# EAGLE board power_stage (EAGLE 7.2.0)
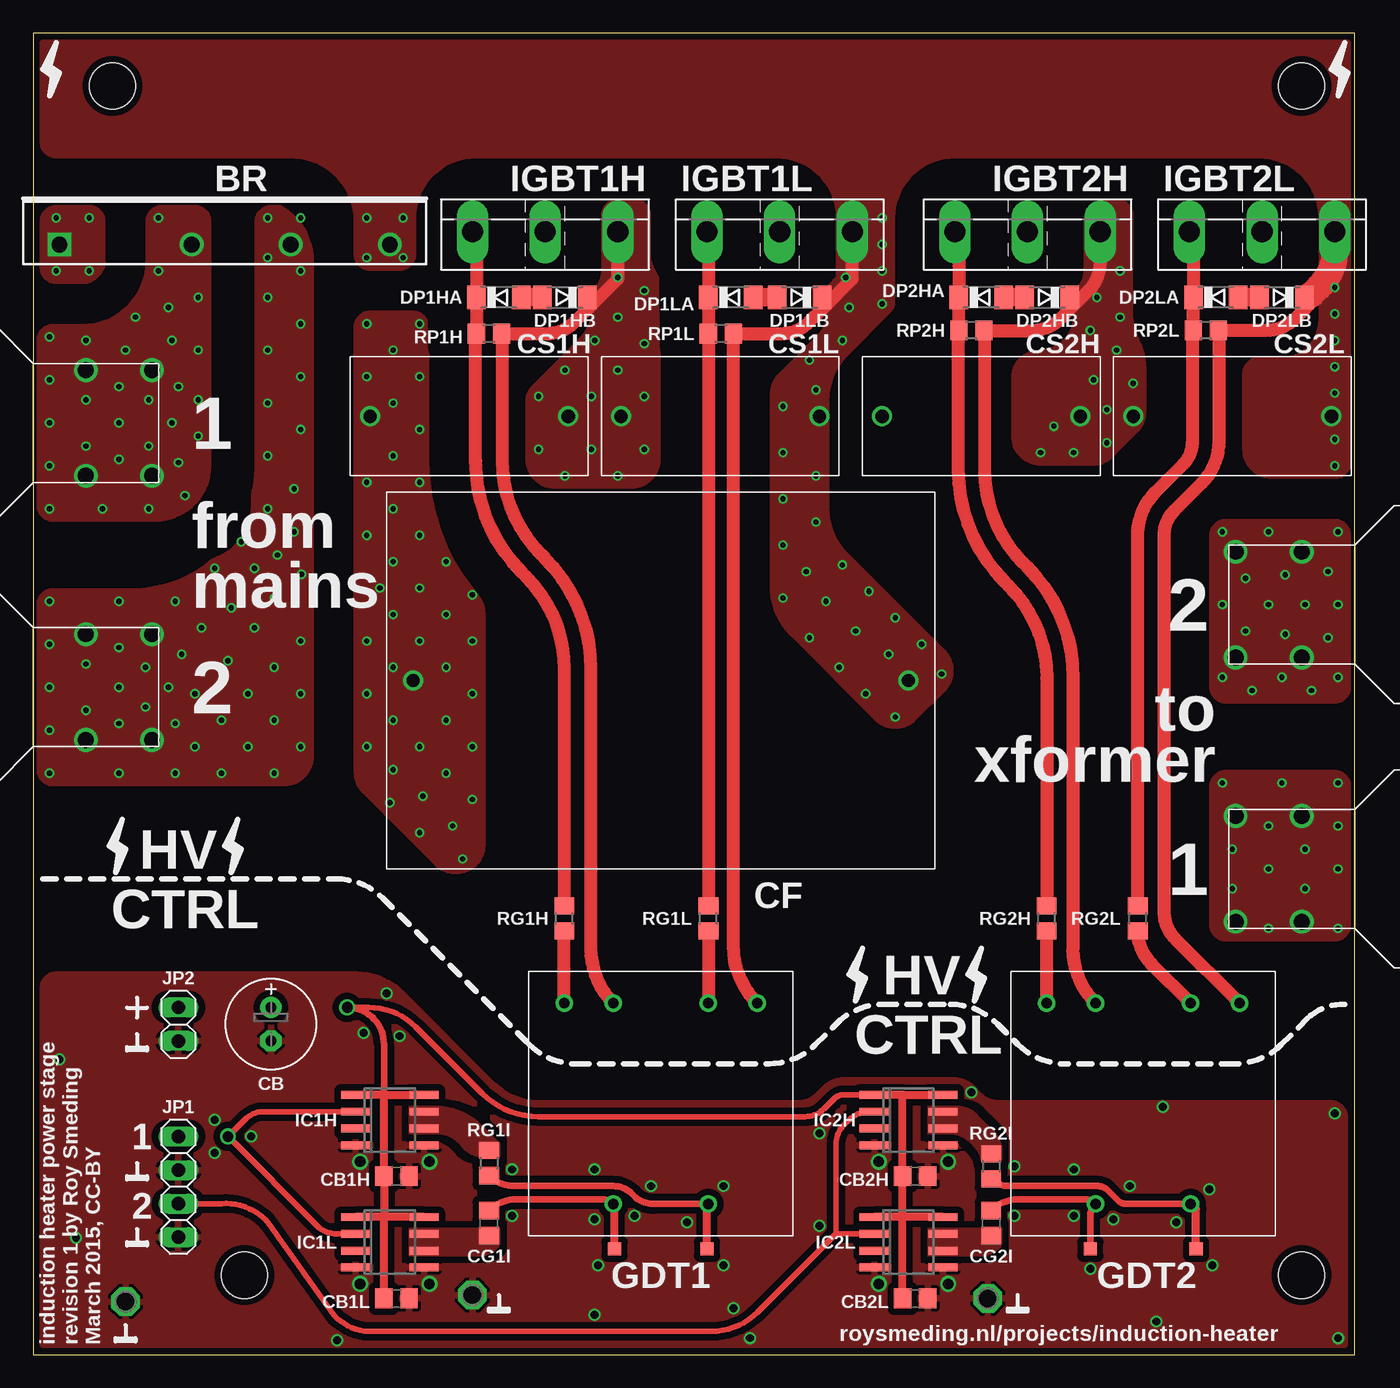
[diagram p0: board, top side]
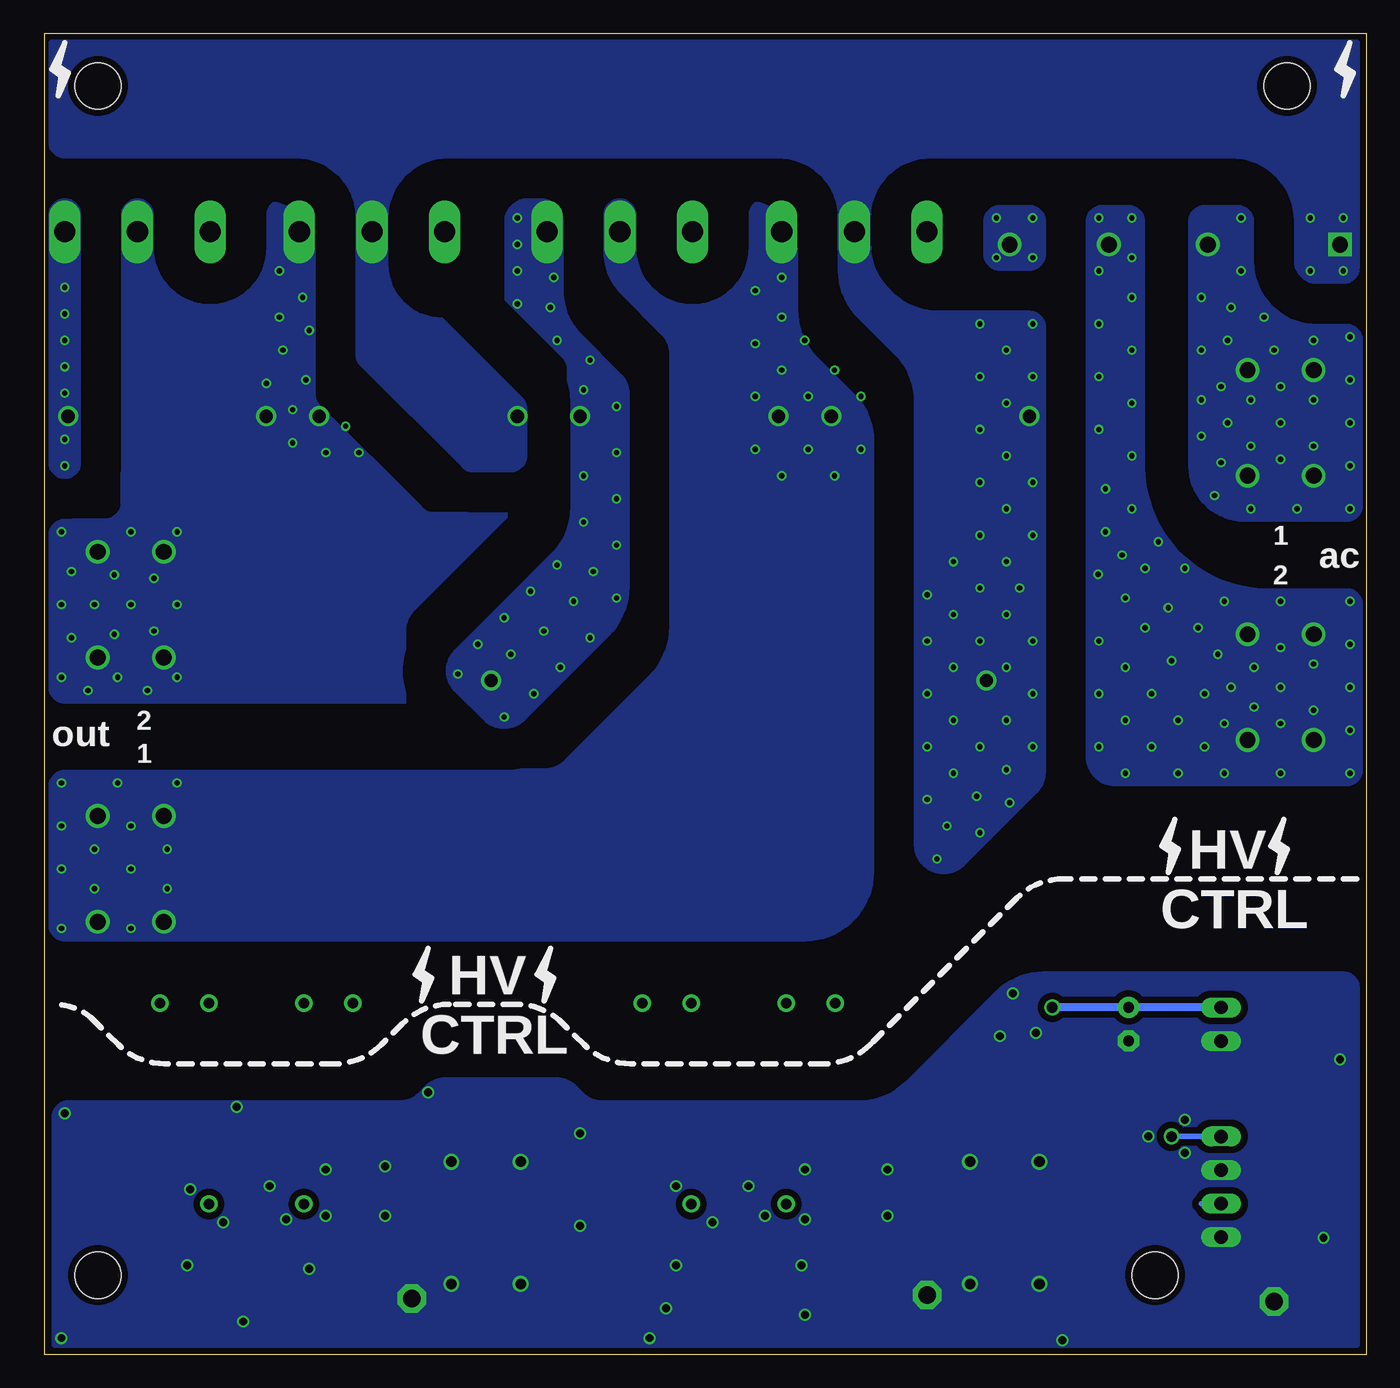
[diagram p1: board, bottom side, seen from below]

Size 100 x 100 mm. Coordinates in mm from the lower left corner, seen from the top.
Outline: 0,0 100,0 100,100 0,100 0,0
Copper layers (1*16): Top 0.035mm / dielectric 1.5mm / Bottom 0.035mm
Design rules "dirt_cheap_dirty_boards.v1 *": minimum track width 5mil, minimum drill 12mil, track to track 5mil, track to pad 5mil, pad to pad 5mil, via to via 5mil, smd to smd 0mil, copper to edge 0mil, drill to drill 10mil, minimum pad ring 10mil, minimum via ring 6mil, stop-mask expansion 2mil, vias tented up to drill 25mil, thermal gap 10mil
Holes 3.5 mm at 96,6 16,6 6,96 96,96

## Footprints (pad centres in the part's own frame; a part is rotated, then mirrored left to right if it is on the bottom)
SCREW = drill 1.2: P$1 -2.5,-4; P$2 -2.5,4; P$3 2.5,4; P$4 2.5,-4
D25XB60 = drill 1.2 square: + -13.75,0 | drill 1.2: - 11.25,0; AC1 -3.75,0; AC2 3.75,0
E2,5-7 = drill 0.813 pad 1.6: + -1.27,0 | drill 0.813 pad 1.6 octagon: - 1.27,0
C0805 = smd 1.3 x 1.5: 1 -0.95,0; 2 0.95,0
R75 = drill 1: P$1 -18.75,0; P$2 18.75,0
R76 = drill 1: P$1 -7.5,0; P$2 7.5,0
SOD80C = smd 1.4 x 1.8: A 1.7,0; C -1.7,0
GDT = drill 0.8: PA -7.6,3.6; PB -7.6,-3.6; S1A 7.6,7.3; S1B 7.6,3.6; S2A 7.6,-7.3; S2B 7.6,-3.6
SO-08 = smd 0.6 x 2.2: 1 -1.905,-2.6; 2 -0.635,-2.6; 3 0.635,-2.6; 4 1.905,-2.6; 5 1.905,2.6; 6 0.635,2.6; 7 -0.635,2.6; 8 -1.905,2.6
TO-247AD-V = drill 1.6 long: D 0,-2.54; G -5.5,-2.54; S 5.5,-2.54
1X04 = drill 1.016 long: 1 -3.81,0; 2 -1.27,0; 3 1.27,0; 4 3.81,0
1X02 = drill 1.016 long: 1 -1.27,0; 2 1.27,0
R0805 = smd 1.3 x 1.5: 1 -0.95,0; 2 0.95,0
TP10SQ = smd 1 x 1: TP 0,0
P1-13 = drill 1.321 pad 2.159 octagon: TP 0,0

## Placement (x,y rotation side)
AC1  AC1  [SCREW]  6.5,70.5 0 top
AC2  AC2  [SCREW]  6.5,50.5 0 top
BR  D25XB60  [D25XB60]  15.75,84 0 top
CB  100µF  [E2,5-7]  18,25 270 top
CB1H  1µF  [C0805]  27.5,13.5 0 top
CB1L  1µF  [C0805]  27.5,4.25 0 top
CB2H  1µF  [C0805]  66.75,13.5 0 top
CB2L  1µF  [C0805]  66.75,4.25 0 top
CF  3.3µF  [R75]  47.5,51 180 top
CG1I  1µF  [C0805]  34.5,9.95 270 top
CG2I  1µF  [C0805]  72.5,9.95 270 top
CS1H  [R76]  33,71 180 top
CS1L  [R76]  52,71 180 top
CS2H  [R76]  71.75,71 180 top
CS2L  [R76]  90.75,71 180 top
DP1HA  [SOD80C]  35.25,80 0 top
DP1HB  [SOD80C]  40.25,80 180 top
DP1LA  [SOD80C]  52.8,80 0 top
DP1LB  [SOD80C]  58,80 180 top
DP2HA  [SOD80C]  71.75,80 0 top
DP2HB  [SOD80C]  76.75,80 180 top
DP2LA  [SOD80C]  89.5,80 0 top
DP2LB  [SOD80C]  94.5,80 180 top
GDT1  GDT  [GDT]  47.5,19 90 top
GDT2  GDT  [GDT]  84,19 90 top
IC1H  MIC4420M  [SO-08]  27,17.75 270 top
IC1L  MIC4429M  [SO-08]  27,8.5 270 top
IC2H  MIC4420M  [SO-08]  66.25,17.75 270 top
IC2L  MIC4429M  [SO-08]  66.25,8.5 270 top
IGBT1H  IXGR32N60CD1  [TO-247AD-V]  38.75,87.5 0 top
IGBT1L  IXGR32N60CD1  [TO-247AD-V]  56.5,87.5 0 top
IGBT2H  IXGR32N60CD1  [TO-247AD-V]  75.25,87.5 0 top
IGBT2L  IXGR32N60CD1  [TO-247AD-V]  93,87.5 0 top
JP1  control  [1X04]  11,12.69 270 top
JP2  power  [1X02]  11,25 90 top
OUT1  OUT1  [SCREW]  93.5,36.75 180 top
OUT2  OUT2  [SCREW]  93.5,56.75 180 top
RG1H  [R0805]  40.2,33 90 top
RG1I  [R0805]  34.5,14.5 270 top
RG1L  [R0805]  51.1,33 90 top
RG2H  [R0805]  76.7,33 90 top
RG2I  [R0805]  72.5,14.25 270 top
RG2L  [R0805]  83.6,33 90 top
RP1H  [R0805]  34.5,77.25 180 top
RP1L  [R0805]  52.05,77.25 180 top
RP2H  [R0805]  71,77.5 180 top
RP2L  [R0805]  88.75,77.5 180 top
TP_GDI1A  A  [TP10SQ]  44,8 0 top
TP_GDI1B  B  [TP10SQ]  51,8 0 top
TP_GDI2A  B  [TP10SQ]  88,8 0 top
TP_GDI2B  A  [TP10SQ]  80,8 0 top
TP_GNDA  GND  [P1-13]  7,4 0 top
TP_GNDB  GND  [P1-13]  33.25,4.5 0 top
TP_GNDC  GND  [P1-13]  72.25,4.25 0 top

## Library data of the parts
AC1 AC2 BR CF CS1H CS1L CS2H CS2L GDT1 GDT2 IC1H IC1L IC2H IC2L IGBT1H IGBT1L IGBT2H IGBT2L OUT1 OUT2 = induction-heater
CB CB1H CB1L CB2H CB2L CG1I CG2I RG1H RG1I RG1L RG2H RG2I RG2L RP1H RP1L RP2H RP2L = rcl
DP1HA DP1HB DP1LA DP1LB DP2HA DP2HB DP2LA DP2LB = diode
JP1 JP2 = pinhead
TP_GDI1A TP_GDI1B TP_GDI2A TP_GDI2B TP_GNDA TP_GNDB TP_GNDC = testpad

## Nets
AC1: AC1.P$1 AC1.P$2 AC1.P$3 AC1.P$4 BR.AC1
AC2: AC2.P$1 AC2.P$2 AC2.P$3 AC2.P$4 BR.AC2
GND [control side]: CB1H.2 CB1L.2 CB2H.2 CB2L.2 CB.- IC1H.4 IC1H.5 IC1L.4 IC1L.5 IC2H.4 IC2H.5 IC2L.4 IC2L.5 JP1.2 JP1.4 JP2.1 TP_GNDA.TP TP_GNDB.TP TP_GNDC.TP
N$1: GDT1.PB RG1I.2 TP_GDI1B.TP
N$2: IC1H.6 IC1H.7 RG1I.1
N$3 [gate drive]: GDT1.S1A RG1H.1
N$4: IC2H.6 IC2H.7 RG2I.1
N$5: GDT2.PB RG2I.2 TP_GDI2A.TP
N$6 [gate drive]: DP1LA.C IGBT1L.G RG1L.2 RP1L.2
N$7 [gate drive]: GDT1.S2B RG1L.1
N$10 [gate drive]: DP2LA.C IGBT2L.G RG2L.2 RP2L.2
N$11 [gate drive]: DP1HA.C IGBT1H.G RG1H.2 RP1H.2
N$12 [gate drive]: GDT2.S2B RG2L.1
N$13 [gate drive]: GDT2.S1A RG2H.1
N$14 [gate drive]: DP2HA.C IGBT2H.G RG2H.2 RP2H.2
N$15 [control side]: IC1H.2 IC1L.2 JP1.1
N$17: DP1LA.A DP1LB.A
N$19: DP1HA.A DP1HB.A
N$20 [control side]: IC2H.2 IC2L.2 JP1.3
N$22 [control side]: CG1I.2 IC1L.6 IC1L.7
N$23: DP2HA.A DP2HB.A
N$24: DP2LA.A DP2LB.A
N$25 [control side]: CG2I.2 IC2L.6 IC2L.7
N$26 [control side]: CG1I.1 GDT1.PA TP_GDI1A.TP
N$27 [control side]: CG2I.1 GDT2.PA TP_GDI2B.TP
OUT1: CS1H.P$1 CS1L.P$2 DP1HB.C GDT1.S1B IGBT1H.S IGBT1L.D OUT1.P$1 OUT1.P$2 OUT1.P$3 OUT1.P$4 RP1H.1
OUT2: CS2H.P$1 CS2L.P$2 DP2HB.C GDT2.S1B IGBT2H.S IGBT2L.D OUT2.P$1 OUT2.P$2 OUT2.P$3 OUT2.P$4 RP2H.1
V+: BR.+ CF.P$2 CS1H.P$2 CS2H.P$2 IGBT1H.D IGBT2H.D
V-: BR.- CF.P$1 CS1L.P$1 CS2L.P$1 DP1LB.C DP2LB.C GDT1.S2A GDT2.S2A IGBT1L.S IGBT2L.S RP1L.1 RP2L.1
VCC [control side]: CB1H.1 CB1L.1 CB2H.1 CB2L.1 CB.+ IC1H.1 IC1H.8 IC1L.1 IC1L.8 IC2H.1 IC2H.8 IC2L.1 IC2L.8 JP2.2

## Tracks (layer width: path | path; a pad name or v marks a point on that pad's centre or on a via)
AC1  (via drill 0.4)
  other vias: 9.5,86 9.5,82 12.5,80 12.5,76 11,73.25 11,67.5 11.5,65 7.75,78.5 1.25,77 1.25,64 6.5,67.75 8.75,64 5.25,64 1.25,67.25 1.25,70.5 1.25,73.75 6.5,70.5 6.5,73.25 4,68.75 4,72.25 4,76.75 10.5,76.75 10.5,70.5 8.75,68.75 8.75,72.25 12.5,72.25 12.5,69.5 7,76 10.25,79.25
  pour Bottom (isolate 3, no thermals): 1.5,63.25 9.25,63.25 arc90 13.25,67.25 13.25,85.75 arc90 12.25,86.75 9.75,86.75 arc90 8.75,85.75 8.75,82.75 arc-90 3.75,77.75 1.5,77.75 arc90 0.5,76.75 0.5,64.25 arc90
  pour Top (isolate 3, no thermals): 1.5,63.25 9.25,63.25 arc90 13.25,67.25 13.25,85.75 arc90 12.25,86.75 9.75,86.75 arc90 8.75,85.75 8.75,82.75 arc-90 3.75,77.75 1.5,77.75 arc90 0.5,76.75 0.5,64.25 arc90
AC2  (via drill 0.4)
  other vias: 1.25,57 10.75,57 10.75,44 1.25,44 6.5,44 6.5,57 6.5,50.5 1.25,50.5 10.25,50.5 11.25,53 10.75,47.75 6.5,47.75 6.5,53.5 4,52.25 4,48.75 1.25,53.75 1.25,47.25 14.25,44 18.25,44 20.25,46 20.25,50 18.25,48 16.25,46 14.25,48 16.25,50 18.25,52 20.25,54 20.3,59.05 18.25,57.25 16.75,55 14.75,52.5 12.25,46 12.25,50 15,56.5 12.75,55 16.75,59.5 18.5,60.5 19.75,62.25 19.75,65.5 17.75,64 20.25,70 17.75,72 17.75,68 17.75,76 20.25,74 17.75,80 20.25,78 20.25,82 15.75,61.5 13.75,59.5 17.75,86 8.5,49 8.5,52 20.25,86 17.75,83
  pour Bottom (isolate 3, no thermals): 21,45.25 21,85.75 arc90 20,86.75 18,86.75 arc90 17,85.75 17,67.25 arc-90 7.5,57.75 1.5,57.75 arc90 0.5,56.75 0.5,44.25 arc90 1.5,43.25 19,43.25 arc90
  pour Top (isolate 3, rank 3, no thermals): 21,45.25 21,85.75 arc90 20,86.75 18,86.75 arc90 17,85.75 17,67.25 arc-90 7.5,57.75 1.5,57.75 arc90 0.5,56.75 0.5,44.25 arc90 1.5,43.25 19,43.25 arc90
GND  (via drill 0.6, 0.8)
  Top 0.6: 68.2,15.85 IC2H.5 69.75,15.85
  other vias: 24.75,14.6 64,14.6 24.75,5.34 30,5.34 64,5.34 69.25,5.34 69.25,14.6 30,14.6 36.25,14 36.25,10.5 59.5,16.75 45.5,10.5 59.5,9.75 46.75,12.75 42.5,3 53,3.5 54.25,1.25 81.75,10.25 74.25,14.25 89,12.5 83,12.75 74.25,10.5 86.5,10 78.75,10.5 89.25,6.75 98.75,1.25 3.25,8.84 2,22.34 26.75,27.34 27.75,24.09 25,24.34 71,19.84 23,1.1 78.75,14 42.5,10.25 42.5,14 52.25,12.75 49.5,10 80,6.5 85,2.5 98.5,18.25 52.25,6.75 42.75,6.75 85.5,18.75 16.5,16.5 13.75,17.75 13.75,15.25
  pour Bottom (isolate 0.5, rank 2, no thermals): 24.43,28.75 1.75,28.75 arc90 0.75,27.75 0.75,0.75 99.25,0.75 99.25,18 arc90 98.25,19 73.08,19 arc-45 71.66,19.59 71.09,20.16 arc45 69.67,20.75 61.33,20.75 arc45 59.91,20.16 59.34,19.59 arc-45 57.92,19 38.32,19 arc-45 34.79,20.46 27.96,27.29 arc45
  pour Top (isolate 0.5, rank 2): 0.75,0.75 0.75,27.75 arc-90 1.75,28.75 24.43,28.75 arc-45 27.96,27.29 34.79,20.46 arc45 38.32,19 57.92,19 arc45 59.34,19.59 59.91,20.16 arc-45 61.33,20.75 69.67,20.75 arc-45 71.09,20.16 71.66,19.59 arc45 73.08,19 98.25,19 arc-90 99.25,18 99.25,0.75
N$1
  Top 0.5: GDT1.PB 46.93,11.4 arc-45 45.51,11.99 45.34,12.16 arc45 43.92,12.75 36.43,12.75 arc-45 RG1I.2
  Top 0.6: TP_GDI1B.TP 51,11.4 GDT1.PB
N$2
  pour Top (no thermals): 28.5,18.75 28.5,16.75 30.67,16.75 arc-45 32.09,16.16 32.66,15.59 arc45 34.08,15 35.25,15 35.25,16 33.96,17.29 arc45 30.43,18.75
N$3
  Top 1: GDT1.S1A RG1H.1
N$4
  pour Top (no thermals): 67.75,18.75 67.75,16.75 69.42,16.75 arc-45 70.84,16.16 71.4,15.6 arc-45 71.75,14.75 73.25,14.75 73.25,15.42 arc45 72.66,16.84 71.34,18.16 arc45 69.92,18.75
N$5
  Top 0.5: GDT2.PB 82.74,11.4 arc-45 82.07,11.68 81.28,12.47 arc45 80.61,12.75 73.83,12.75 arc-45 RG2I.2
  Top 0.6: TP_GDI2A.TP 88,11 GDT2.PB
N$6
  Top 1: RG1L.2 RP1L.2 DP1LA.C 51.1,84.86 IGBT1L.G
N$7
  Top 1: RG1L.1 GDT1.S2B
N$10
  Top 1: IGBT2L.G 87.8,84.66 DP2LA.C RP2L.2 87.75,77.5 87.75,69.11 arc-45 87.02,67.35 84.92,65.25 arc45 83.6,62.06 RG2L.2
N$11
  Top 1: RG1H.2 40.2,51.83 arc45 37.27,58.9 37.02,59.16 arc-45 33.5,67.64 33.5,77.25 RP1H.2 DP1HA.C 33.55,84.66 IGBT1H.G
N$12
  Top 1: GDT2.S2B 84.62,29.57 arc-45 RG2L.1
N$13
  Top 1: GDT2.S1A RG2H.1
N$14
  Top 1: RG2H.2 76.7,51.16 arc45 73.77,58.23 73.52,58.48 arc-45 70,66.97 70,77.5 RP2H.2 DP2HA.C 70.05,84.66 IGBT2H.G
N$15  (via drill 0.8)
  Top 0.4: IC1H.2 17.46,18.38 arc45 16.05,17.8 v14.75,16.5 21.53,9.72 arc45 22.94,9.13 IC1L.2
  Bottom 0.4: JP1.1 v14.75,16.5
N$17
  Top 1.4: DP1LA.A DP1LB.A
N$19
  Top 1.4: DP1HA.A DP1HB.A
N$20
  Top 0.4: IC2L.2 60.75,9.13 | IC2H.2 63.21,18.38 arc45 61.8,17.8 61.34,17.34 arc45 60.75,15.92 60.75,9.13 | 60.75,9.13 54.83,3.21 arc-45 51.29,1.75 25.77,1.75 arc-50 22.75,3 17.79,9.96 arc55 14.26,11.42 JP1.3
  Bottom 0.4: JP1.3 12.5,11.42
N$22
  pour Top (no thermals): 28.5,9.5 35.25,9.5 35.25,8.48 arc-45 35.09,8.09 arc-45 33.67,7.5 28.5,7.5
N$23
  Top 1.4: DP2HA.A DP2HB.A
N$24
  Top 1.4: DP2LB.A DP2LA.A
N$25
  pour Top (no thermals): 67.75,9.5 73.25,9.5 73.25,8.48 arc-45 73.09,8.09 arc-45 71.67,7.5 67.75,7.5
N$26
  Top 0.5: 44,11.3 GDT1.PA arc45 43.05,11.75 36.55,11.75 arc45 CG1I.1
  Top 0.6: TP_GDI1A.TP 44,11.3
N$27
  Top 0.5: CG2I.1 arc-45 74.55,11.75 79.56,11.75 arc-45 GDT2.PA arc45 80,10.43 TP_GDI2B.TP
OUT1  (via drill 0.4)
  Top 1: GDT1.S1B arc-45 42.2,30.7 42.2,51.83 arc45 38.69,60.31 38.43,60.57 arc-45 35.5,67.64 35.5,77.25 | IGBT1H.S 44.25,81.4 42.05,79.2 | RP1H.1 35.5,77.25 | 35.5,77.25 38.86,77.25 arc45 40.98,78.13 42.05,79.2 | DP1HB.C 42.05,79.2
  other vias: 38.25,68.5 38.25,72.5 40.25,74.5 42.5,76.75 44.25,78.5 46.25,80.5 46.25,76.5 46.25,72.5 44.25,74.5 42.25,72.5 42.25,68.5 46.25,68.5 44.25,81.5 93.5,36.75 98.75,32.25 93.5,32.25 40.25,66.5 44.25,66.5 94.5,43.25 98.75,43.25 98.75,36.75 98.75,40 96.25,38.25 96.25,35.25 90.75,38.25 90.75,35.25 93.5,40 90,43.25
  pour Bottom (isolate 3, rank 4, no thermals): 98.5,44 65.07,44 arc-45 61.54,45.46 54.8,52.2 arc-45 52.5,57.75 52.5,72.88 arc-45 54,76.5 57.06,79.56 arc45 57.5,80.62 57.5,86.25 arc90 56.5,87.25 arc90 55.5,86.25 55.5,83.75 arc-90 51,79.25 arc-90 46.5,83.75 46.5,86.25 arc90 45.5,87.25 44.25,87.25 arc90 43.25,86.25 43.25,82.02 arc-45 40.76,76.01 37.94,73.19 arc45 37.5,72.13 37.5,36.5 arc90 42.5,31.5 98.5,31.5 arc90 99.5,32.5 99.5,43 arc90
  pour Top (isolate 3, rank 4, no thermals): 47.25,67.75 47.25,81.01 arc27 47.14,81.46 46.71,82.33 arc-27 46.5,83.22 46.5,86.25 arc90 45.5,87.25 44.25,87.25 arc90 43.25,86.25 43.25,82.08 arc-45 42.66,80.66 42.75,80.5 42.75,80.07 arc-45 41.29,76.54 37.94,73.19 arc45 37.5,72.13 37.5,67.75 arc90 39.5,65.75 45.25,65.75 arc90
  pour Top (no thermals): 98.5,44 90.25,44 arc90 89.25,43 89.25,32.5 arc90 90.25,31.5 98.5,31.5 arc90 99.5,32.5 99.5,43 arc90
OUT2  (via drill 0.4)
  Top 1: IGBT2H.S 80.75,82.64 arc-45 79.87,80.52 78.55,79.2 | 72,77.5 75.61,77.5 arc45 77.73,78.38 78.55,79.2 | DP2HB.C 78.55,79.2 | GDT2.S1B arc-45 78.7,30.7 78.7,51.16 arc45 75.19,59.64 74.93,59.9 arc-45 72,66.97 72,77.5 | RP2H.1 72,77.5
  other vias: 90,62.25 93.5,62.25 93.5,56.75 90,56.75 98.75,56.75 96.25,56.75 98,59.25 94.75,59 91.75,58.75 91.75,54.75 94.75,54.5 98,54.25 98.75,51.25 90,51.25 94.5,51.25 98.75,62.25 78.75,68.25 77.25,70.25 80.25,73.75 80,77.5 82,76 82.25,78.5 80.5,80 82.25,82 76.25,68.25 81.25,69 92.25,50.25 96.75,50.25 83.25,73.5 81.25,71.5
  pour Bottom (isolate 3, rank 4, no thermals): 94,67.25 94,86.25 arc90 93,87.25 arc90 92,86.25 92,83.75 arc-90 87.5,79.25 arc-90 83,83.75 83,86.25 arc90 82,87.25 80.75,87.25 arc90 79.75,86.25 79.75,75.52 arc-45 78.5,72.5 70.75,64.75 arc-45 67.73,63.5 63.5,63.5 71.49,55.82 arc-67 72.71,49.5 98.5,49.5 arc90 99.5,50.5 99.5,62 arc90 98.5,63 98.25,63 arc-90
  pour Top (isolate 3, rank 4, no thermals): 83,78.84 83,86.25 arc90 82,87.25 81.25,87.25 arc90 79.75,85.75 79.75,82.08 arc-45 79.16,80.66 79,80.5 79,78.75 arc-90 76,75.75 arc90 74.25,74 74.25,69.5 arc90 76.25,67.5 80.17,67.5 arc45 81.59,68.09 83.41,69.91 arc45 84,71.33 84,74.61 arc27 83.49,76.77 arc-27
  pour Top (no thermals): 98.5,63 90.25,63 arc90 89.25,62 89.25,50.5 arc90 90.25,49.5 98.5,49.5 arc90 99.5,50.5 99.5,62 arc90
V+  (via drill 0.4)
  other vias: 27.25,76 29.25,78 27.25,72 25.25,78 29.25,70 27.25,68 27.25,64 29.25,66 25.25,66 25.25,74 29.25,74 25.25,62 29.25,62 27.25,60 26.25,58 29.25,58 27.25,56 25.25,54 31.25,56 29.25,54 33.25,54 31.25,52 33.25,50 31.25,48 29.25,46 31.25,44 27.25,44.25 25.25,46 27.25,48 33.25,46 27.25,52 25.25,50 31.25,60 33.25,57.5 4.25,82 4.25,86 1.75,86 1.75,82 29.5,42.25 31.75,40 32.5,37.5 33.25,42 27,41.75 29.25,39.5
  pour Bottom (isolate 3, rank 2, no thermals): 74.25,87.25 74.25,82.5 arc-90 70,78.25 64.04,72.29 arc45 63.75,71.59 63.75,68 arc90 64.75,67 67.59,67 arc45 68.29,67.29 75.96,74.94 arc45 76.25,75.65 76.25,87.25
  pour Bottom (isolate 3, rank 2, no thermals): 37.75,86 37.75,84.07 arc-45 36.29,80.54 35.96,80.21 arc-45 32.43,78.75 25.5,78.75 arc90 24.5,77.75 24.5,44.08 arc45 25.09,42.66 30.59,37.16 arc135 34,38.58 34,72.18 arc-45 35.46,75.71 38.29,78.54 arc45 39.75,82.07 39.75,86
  pour Bottom (isolate 0.5, rank 2, no thermals): 99.5,91.75 99.5,99.25 0.75,99.25 0.75,82.25 arc90 1.75,81.25 3.75,81.25 arc90 5.25,82.75 5.25,85.75 arc-90 10.25,90.75 33,90.75 arc-90 37.75,86 37.75,85 39.75,85 39.75,86 arc-90 44.5,90.75 69.5,90.75 arc-90 74.25,86 74.25,85 76.25,85 76.25,86 arc-90 81,90.75 98.5,90.75 arc90
  pour Top (isolate 3, rank 2, no thermals): 24.5,77.75 24.5,44.08 arc45 25.09,42.66 30.59,37.16 arc135 34,38.58 34,56.04 arc39 33.55,57.3 33.26,57.67 arc-39 29.75,67.58 29.75,77.75 arc90 28.75,78.75 25.5,78.75 arc90
  pour Top (isolate 0.5, rank 4, no thermals): 1.75,86.75 4.25,86.75 arc-90 5.25,85.75 5.25,82.75 arc-90 3.75,81.25 1.75,81.25 arc-90 0.75,82.25 0.75,85.75 arc-90
V-  (via drill 0.4)
  Top 1: 59.8,79.2 58.73,78.13 arc-45 56.61,77.25 RP1L.1 53,30.95 arc45 GDT1.S2A | IGBT1L.S 62,81.4 59.8,79.2 | 96.3,79.2 95.48,78.38 arc-45 93.36,77.5 89.75,77.5 | DP1LB.C 59.8,79.2 | 96.3,79.2 96.2,79.3 DP2LB.C | 98.5,83.3 IGBT2L.S | 96.75,80.25 96.75,79.65 96.3,79.2 | 89.75,77.5 89.75,69.11 arc-45 88.43,65.93 86.33,63.83 arc45 85.6,62.06 85.6,33.5 arc45 86.45,31.45 GDT2.S2A | 89.75,77.5 RP2L.1
  Top 2: 98.5,83.3 arc-45 97.29,80.79 96.75,80.25
  other vias: 25.25,86 28,86 28,83 25.25,83 56.75,57.25 58.5,59.25 56.75,64.75 59.25,66.5 56.75,71.75 58.75,75.25 61.25,76.75 61.75,79.25 61.5,81.5 64.25,86 64.25,82 56.75,68.25 59.25,63 56.75,61.25 60,57 62.25,54.75 64.75,53 63,50 61,52 58.75,54.25 65.25,55.75 63.25,57.75 61.25,59.75 67.25,53.75 68.75,51.5 65.25,48.25 59.25,73 98.5,67.25 98.5,69.25 98.5,72.75 98.5,74.75 98.5,76.75 98.5,78.75 98.5,80.75 64.25,79.5 64.25,84
  pour Bottom (isolate 3, rank 3, no thermals): 62.5,87.25 63.5,87.25 arc-90 65,85.75 65,79.66 arc-45 64.71,78.96 61.46,75.71 arc45 60,72.18 60,64.07 arc45 61.46,60.54 68.84,53.16 arc-90 68.84,50.34 66.66,48.16 arc-90 63.84,48.16 57.46,54.54 arc-45 56,58.07 56,72.67 arc-45 56.58,74.08 59.54,77.05 arc45 61,80.58 61,85.75 arc-90
  pour Bottom (isolate 0.5, rank 2, no thermals): 98.5,87.25 arc90 97.5,86.25 97.5,67.5 arc90 98.5,66.5 arc90 99.5,67.5 99.5,86.25 arc90
  pour Top (isolate 0.5, rank 2, no thermals): 56,57.82 56,72.67 arc-45 56.59,74.09 59.66,77.16 arc45 60.25,78.58 60.25,80.75 61,81.5 61,86 arc90 56.25,90.75 33.5,90.75 arc90 28.75,86 28.75,83.25 arc-90 27.75,82.25 25.5,82.25 arc-90 24.5,83.25 24.5,85.75 arc90 19.5,90.75 1.75,90.75 arc-90 0.75,91.75 0.75,99.25 99.5,99.25 99.5,67.5 arc-90 98.5,66.5 93.75,66.5 arc-90 91.75,68.5 91.75,74.25 arc-90 92.75,75.25 94.5,75.25 arc90 97.5,78.25 97.5,86 arc90 92.75,90.75 69.75,90.75 arc90 65,86 65,79.66 arc-45 64.71,78.96 61.46,75.71 arc45 60,72.18 60,64.07 arc45 61.46,60.54 68.84,53.16 arc-90 68.84,50.34 66.66,48.16 arc-90 63.84,48.16 57.71,54.29 arc-45
  pour Bottom (isolate 3, rank 4, no thermals): 24.5,83.25 24.5,85.75 arc-90 25.5,86.75 27.75,86.75 arc-90 28.75,85.75 28.75,83.25 arc-90 27.75,82.25 25.5,82.25 arc-90
VCC  (via drill 0.8)
  Top 0.4: IC2H.1 61.32,19.66 arc45 60.61,19.36 59.84,18.59 arc-45 58.42,18 38.23,18 arc-45 33.99,19.76 28.94,24.81 arc45 25.41,26.27 v23.77,26.27
  Top 0.5: v23.77,26.27 arc-90 26.55,23.49 26.55,19.66
  Top 0.6: 65.8,19.66 IC2H.8 | 65.8,19.66 CB2H.1 65.8,10.41 | 65.8,19.66 IC2H.1 | 65.8,10.41 IC2L.1 | IC2L.8 65.8,10.41 | 26.55,19.66 IC1H.8 | 26.55,19.66 CB1H.1 26.55,10.41 | 26.55,19.66 IC1H.1 | 26.55,10.41 IC1L.1 | IC1L.8 26.55,10.41 | CB1L.1 26.55,10.41 | CB2L.1 65.8,10.41
  Bottom 0.6: JP2.2 CB.+ v23.77,26.27

## Text on the board
tPlace: 1 | from / mains | 2 | 2 | to / xformer | HV | 1 | CTRL | HV | CTRL | 1 | 2 | induction heater power stage / revision 1 by Roy Smeding / March 2015, CC-BY | roysmeding.nl/projects/induction-heater
bPlace: 1 | ac | 2 | 2 | out | 1 | HV | CTRL | HV | CTRL